# EAGLE board BPSDSchematic2.1 (EAGLE 6.5.1)
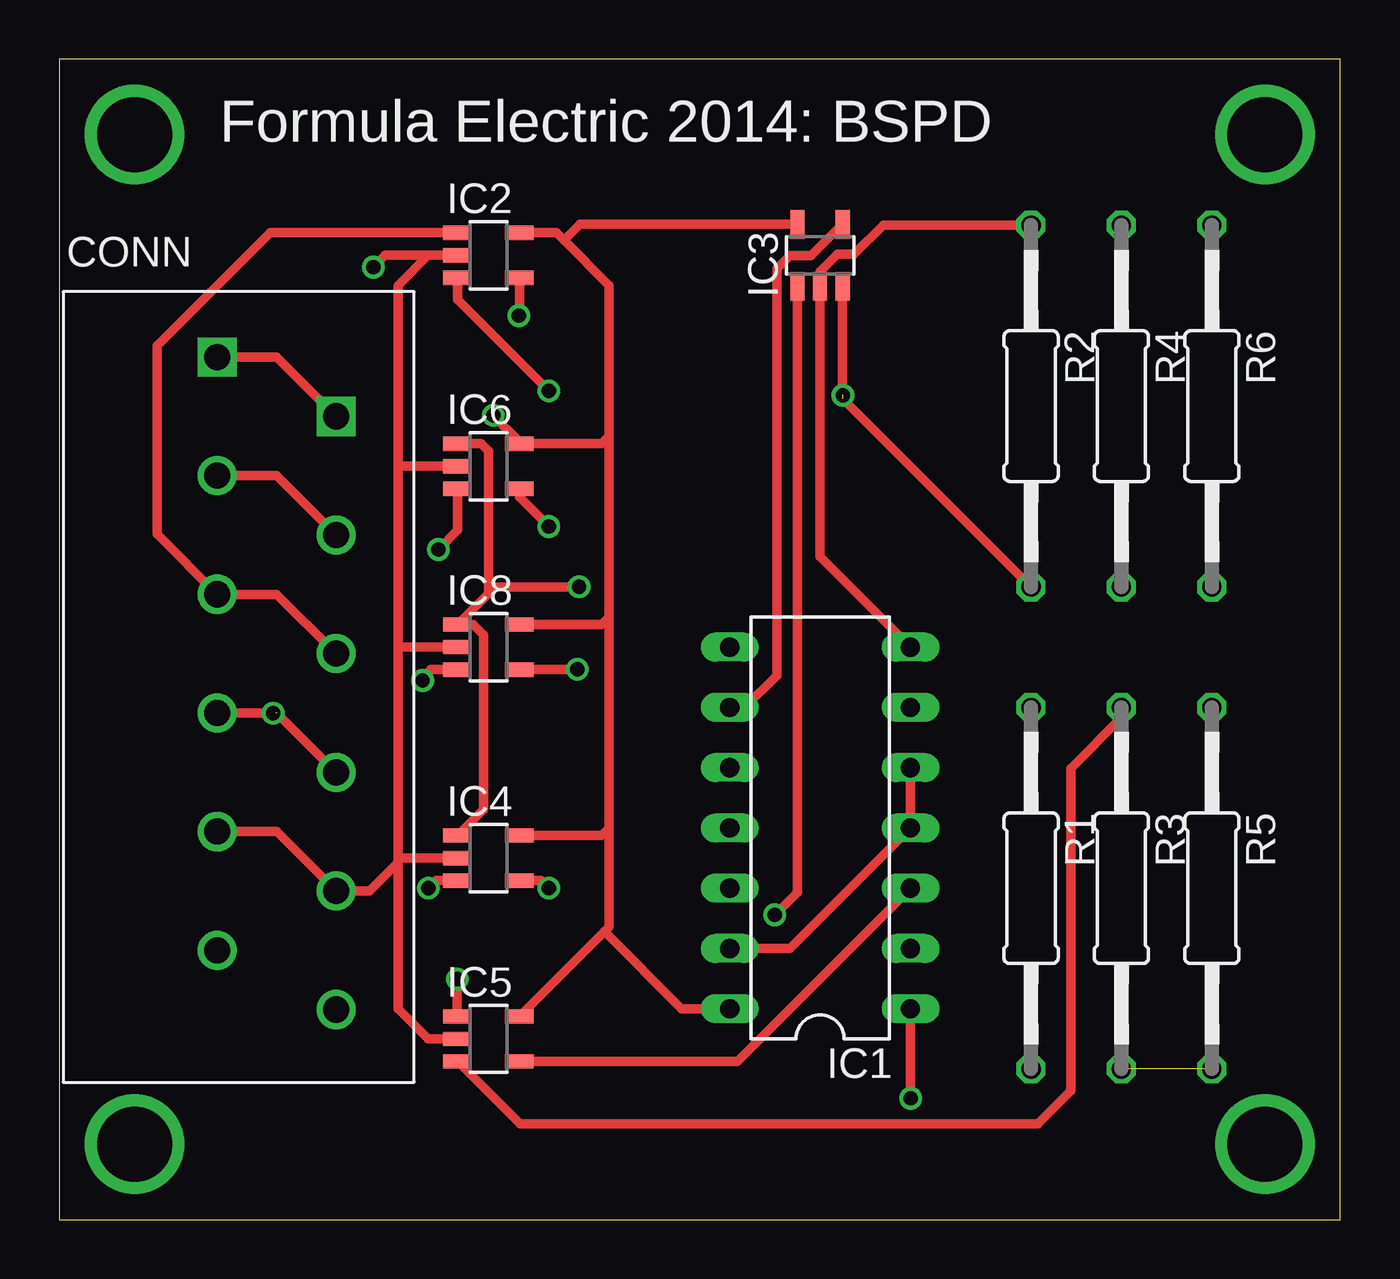
[diagram p0: board, top side]
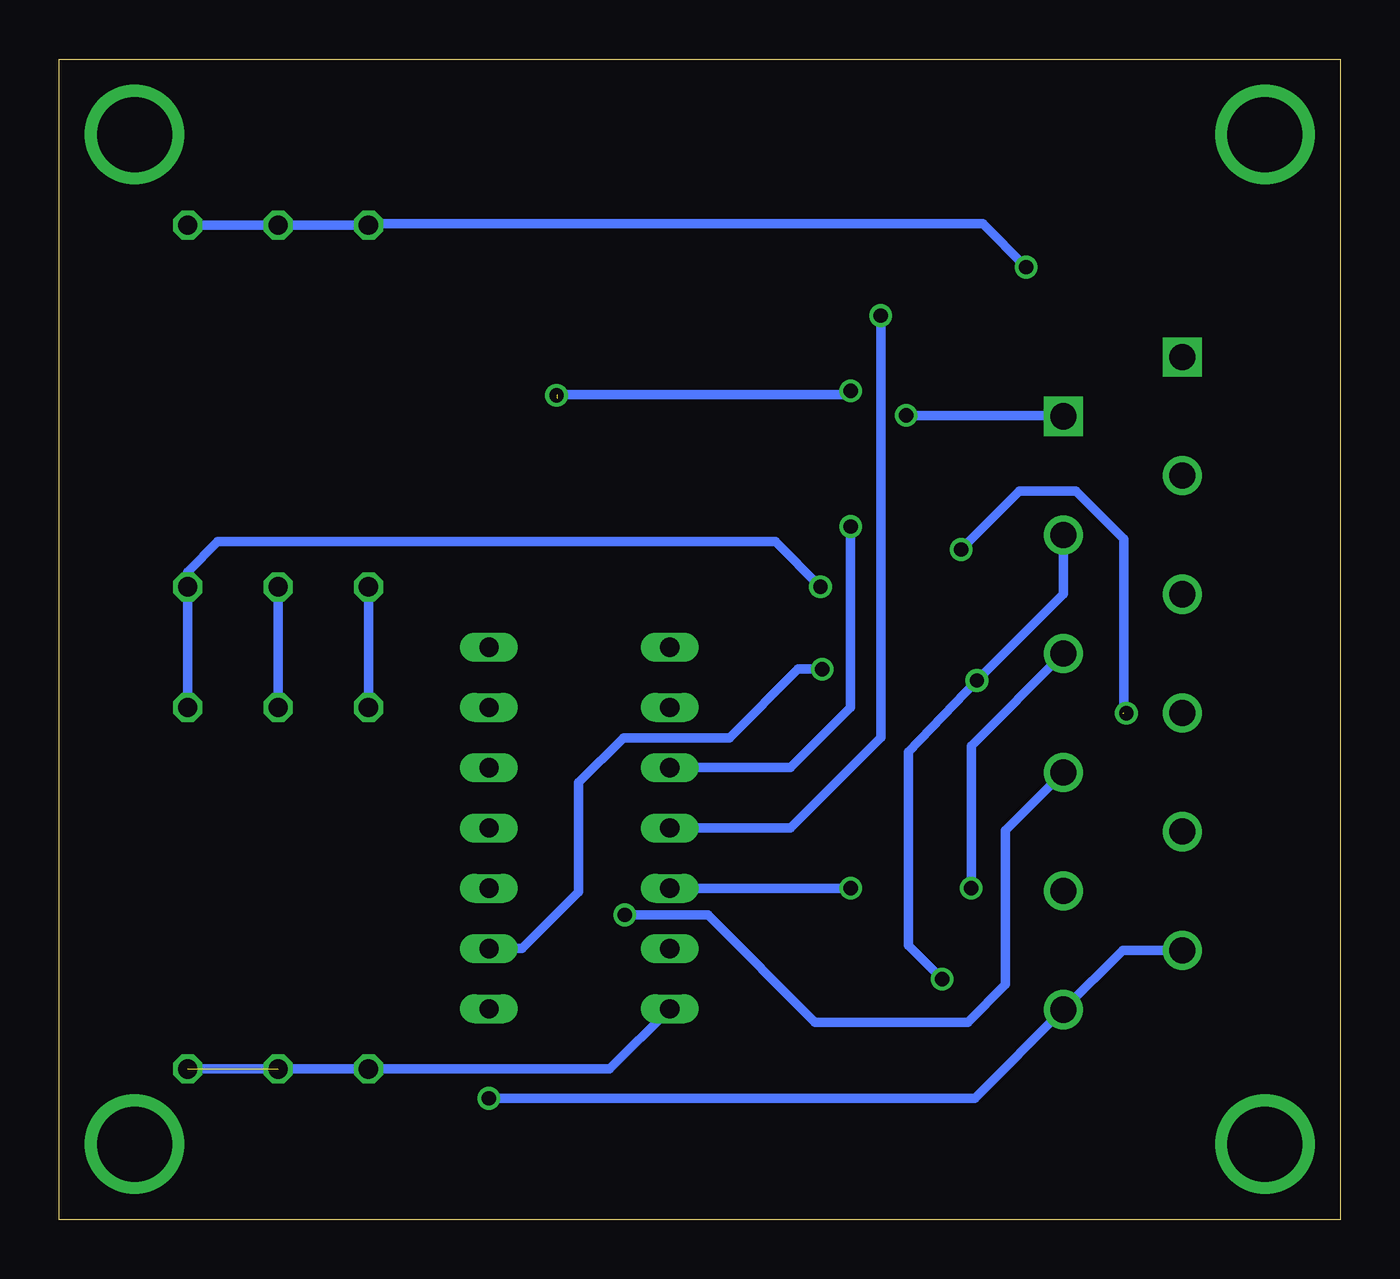
[diagram p1: board, bottom side, seen from below]

Size 53.98 x 48.9 mm. Coordinates in mm from the lower left corner, seen from the top.
Outline: 0,0 53.98,0 53.98,48.9 0,48.9 0,0
Copper layers (1*16): Top 0.0356mm / dielectric 1.5011mm / Bottom 0.0356mm
Design rules "OshPark DRC": minimum track width 6mil, minimum drill 13mil, track to track 6mil, track to pad 6mil, pad to pad 6mil, via to via 6mil, smd to smd 6mil, copper to edge 15mil, drill to drill 6mil, minimum pad ring 7mil, minimum via ring 7mil, stop-mask expansion 3mil, vias tented up to drill 0mil, thermal gap 10mil
Net classes: 0 default: width 0.305 mm, drill 0.508 mm, clearance 0.254 mm

## Footprints (pad centres in the part's own frame; a part is rotated, then mirrored left to right if it is on the bottom)
CONNECTOR_6 = drill 1.1 square: 1 0,0; 2 2.5,5 | drill 1.1: 3 5,0; 4 7.5,5; 5 10,0; 6 12.5,5; 7 15,0; 8 17.5,5; 9 20,0; 10 22.5,5; 11 25,0; 12 27.5,5
DIL14 = drill 0.813 long: 1 -7.62,-3.81; 2 -5.08,-3.81; 3 -2.54,-3.81; 4 0,-3.81; 5 2.54,-3.81; 6 5.08,-3.81; 7 7.62,-3.81; 8 7.62,3.81; 9 5.08,3.81; 10 2.54,3.81; 11 0,3.81; 12 -2.54,3.81; 13 -5.08,3.81; 14 -7.62,3.81
DBV-R-PDSO-G5 = smd 0.6 x 1.2: 1 -0.95,-1.306; 2 0,-1.306; 3 0.95,-1.306; 4 0.95,1.306; 5 -0.95,1.306
0207/15 = drill 0.813 octagon: 1 -7.62,0; 2 7.62,0

## Placement (x,y rotation side)
CONN  CONN_6  [CONNECTOR_6]  6.66,36.35 270 top
IC1  4082N  [DIL14]  32.06,16.5 90 top
IC2  TL331  [DBV-R-PDSO-G5]  18.09,40.63 270 top
IC3  TL331  [DBV-R-PDSO-G5]  32.06,40.63 0 top
IC4  TL331  [DBV-R-PDSO-G5]  18.09,15.23 270 top
IC5  TL331  [DBV-R-PDSO-G5]  18.09,7.61 270 top
IC6  TL331  [DBV-R-PDSO-G5]  18.09,31.74 270 top
IC8  TL331  [DBV-R-PDSO-G5]  18.09,24.12 270 top
R1  200k  [0207/15]  40.95,13.96 270 top
R2  120k  [0207/15]  40.95,34.28 270 top
R3  180k  [0207/15]  44.76,13.96 270 top
R4  22k  [0207/15]  44.76,34.28 270 top
R5  230k  [0207/15]  48.57,13.96 270 top
R6  10k  [0207/15]  48.57,34.28 270 top

## Library data of the parts
CONN = formula electric
IC1 = 40xx
IC2-IC6 IC8 = linear
R1-R6 = rcl

## Nets
BRAKE1: CONN.5 CONN.6 IC2.1 IC4.3
BRAKE2: CONN.7 CONN.8 IC3.1 IC6.3
CS: CONN.3 CONN.4 IC5.1 IC8.3
GND: CONN.9 CONN.10 IC1.7 IC2.2 IC3.2 IC4.2 IC5.2 IC6.2 IC8.2 R2.1 R4.1 R6.1
N$3: IC1.12 IC4.4
N$4: IC1.11 IC2.4
N$5: IC1.10 IC6.4
N$6: IC1.9 IC3.4
N$7: IC1.2 IC8.4
N$9: IC1.4 IC1.5 IC1.13
N$10: IC2.3 IC3.3 R1.1 R2.2
N$11: IC4.1 IC6.1 IC8.1 R5.1 R6.2
N$15: IC5.3 R3.1 R4.2
N$17: IC1.3 IC5.4
OUTPUT: CONN.11 CONN.12 IC1.1
VDD: CONN.1 CONN.2 IC1.14 IC2.5 IC3.5 IC4.5 IC5.5 IC6.5 IC8.5 R1.2 R3.2 R5.2

## Tracks (layer width: path | path; a pad name or v marks a point on that pad's centre or on a via)
BRAKE1  (via drill 0.6)
  Top 0.406: CONN.6 9.16,26.35 CONN.5 4.12,28.89 4.12,36.82 8.88,41.58 IC2.1 | v15.55,13.96 15.87,14.28 IC4.3
  Bottom 0.406: CONN.6 15.55,19.96 v15.55,13.96
BRAKE2  (via drill 0.6)  (1 unrouted)
  Top 0.406: CONN.7 9.16,21.35 CONN.8 | IC6.3 16.78,29.05 v15.97,28.24 | IC3.1 31.11,13.8 v30.15,12.84
  Bottom 0.406: v15.97,28.24 13.51,30.7 11.15,30.7 9.13,28.68 9.13,21.35 | CONN.8 14.1,16.41 14.1,9.9 15.69,8.32 22.12,8.32 26.64,12.84 v30.15,12.84
CS  (via drill 0.6)
  Top 0.406: CONN.3 9.16,31.35 CONN.4 | v15.3,22.71 15.64,23.17 IC8.3 | v16.77,10.13 16.77,8.58 IC5.1
  Bottom 0.406: v16.77,10.13 18.18,11.55 18.18,19.72 v15.3,22.71 11.66,26.36 CONN.4
GND  (via drill 0.6)
  Top 0.406: CONN.9 9.16,16.35 CONN.10 13.07,13.85 14.28,15.06 | 14.28,31.74 14.28,39.36 15.55,40.63 IC2.2 13.73,40.63 v13.24,40.14 | 14.28,31.74 14.28,24.12 | 14.28,24.12 14.28,15.23 | 14.28,15.23 14.28,15.06 | 14.28,15.06 14.28,8.88 15.55,7.61 IC5.2 | IC6.2 14.28,31.74 | IC8.2 14.28,24.12 | IC4.2 14.28,15.23 | IC1.7 32.06,27.93 IC3.2 32.06,39.95 32.78,40.68 33.49,40.68 34.72,41.9 R2.1
  Bottom 0.406: R6.1 R4.1 R2.1 40.95,41.96 15.06,41.96 v13.24,40.14
N$1  (via drill 0.6)
  other vias: 33.02,34.74
N$2  (via drill 0.6)
  other vias: 9.01,21.33
N$3  (via drill 0.6)
  Top 0.406: IC4.4 20.31,14.28 v20.63,13.96
  Bottom 0.406: v20.63,13.96 IC1.12
N$4  (via drill 0.6)
  Top 0.406: IC2.4 19.39,38.13 v19.36,38.09
  Bottom 0.406: v19.36,38.09 19.36,20.31 23.17,16.5 IC1.11
N$5  (via drill 0.6)
  Top 0.406: IC6.4 19.39,30.44 v20.63,29.2
  Bottom 0.406: v20.63,29.2 20.63,21.58 23.17,19.04 IC1.10
N$6
  Top 0.406: IC3.4 31.68,40.61 30.78,40.61 30.23,40.07 30.23,22.93 28.88,21.58 IC1.9
N$7  (via drill 0.6)
  Top 0.406: IC8.4 21.81,23.17 v21.83,23.2
  Bottom 0.406: v21.83,23.2 22.84,23.2 25.74,20.3 30.2,20.3 32.09,18.42 32.09,13.82 34.48,11.42 IC1.2
N$8  (via drill 3.17)
  other vias: 3.17,45.72
N$9
  Top 0.406: IC1.5 IC1.4 30.79,11.42 IC1.13
N$10  (via drill 0.6)  (1 unrouted)
  Top 0.406: IC2.3 16.78,38.77 v20.63,34.92 | R2.2 33.01,34.6 IC3.3
  Bottom 0.406: R2.2 R1.1 | v20.63,34.92 20.79,34.76 33.01,34.76
N$11  (via drill 0.6)
  Top 0.406: 18.09,26.66 18.09,32.38 17.77,32.69 IC6.1 | 18.09,26.66 18.09,26.38 IC8.1 17.44,25.07 17.88,24.63 17.88,17.28 IC4.1 | 18.09,26.66 v21.9,26.66
  Bottom 0.406: R5.1 R6.2 48.57,27.3 47.3,28.57 23.8,28.57 v21.9,26.66
N$12  (via drill 3.17)
  other vias: 50.8,45.72
N$13  (via drill 3.17)
  other vias: 3.17,3.17
N$14  (via drill 3.17)
  other vias: 50.8,3.17
N$15
  Top 0.406: R3.1 44.76,21.15 42.63,19.02 42.63,5.42 41.23,4.03 19.41,4.03 IC5.3
  Bottom 0.406: R4.2 R3.1
N$17
  Top 0.406: IC5.4 28.57,6.66 IC1.3
OUTPUT  (via drill 0.6)
  Top 0.406: v35.88,5.11 35.87,5.12 IC1.1
  Bottom 0.406: CONN.11 9.16,11.35 CONN.12 15.39,5.11 v35.88,5.11
VDD  (via drill 0.6)  (1 unrouted)
  Top 0.406: CONN.1 9.16,36.35 CONN.2 | IC2.5 20.95,41.58 21.26,41.27 | 21.26,41.27 23.17,39.36 23.17,33.01 | 23.17,33.01 23.17,25.39 | 23.17,25.39 23.17,16.5 | 23.17,16.5 23.17,12.34 22.97,12.14 | 22.97,12.14 IC5.5 | 23.17,33.01 22.85,32.69 IC6.5 19.39,32.78 v18.29,33.89 | IC8.5 22.85,25.07 23.17,25.39 | IC4.5 22.85,16.18 23.17,16.5 | IC3.5 21.93,41.94 21.26,41.27 | IC1.14 26.22,8.88 22.97,12.14
  Bottom 0.406: R5.2 R1.2 30.79,6.34 IC1.14 | CONN.2 11.7,33.89 v18.29,33.89

## Text on the board
tNames: Formula Electric 2014: BSPD